# Altium PCB PCB1.PcbDoc
Units mm, origin at the board's own origin, x right, y up, seen from the top; angles counter-clockwise.
Board outline 50 x 65 mm, 2 copper layers (Top Layer, Bottom Layer); 27 components, 24 nets, 140 pads, 7 vias.
Unrouted connection lines stored in the file: 43.
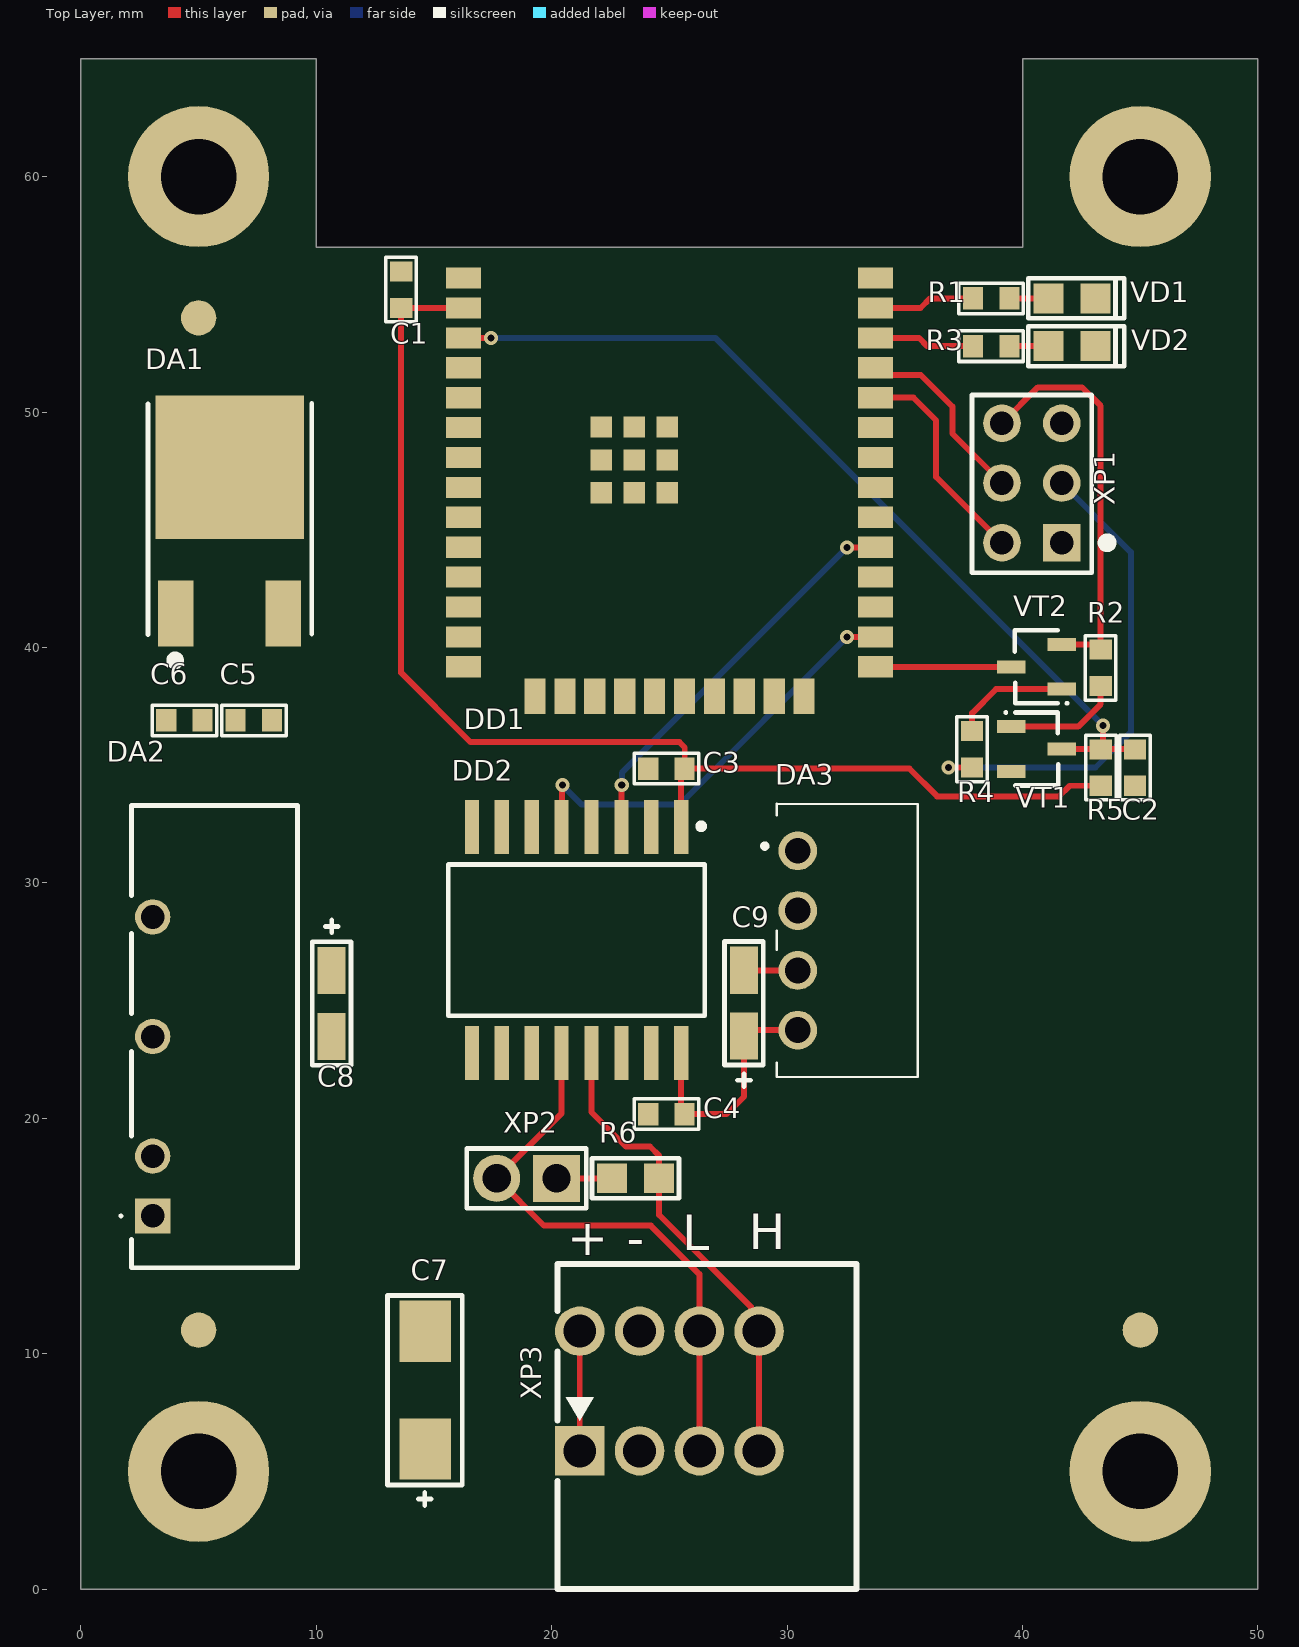
[diagram p0: Top Layer view]
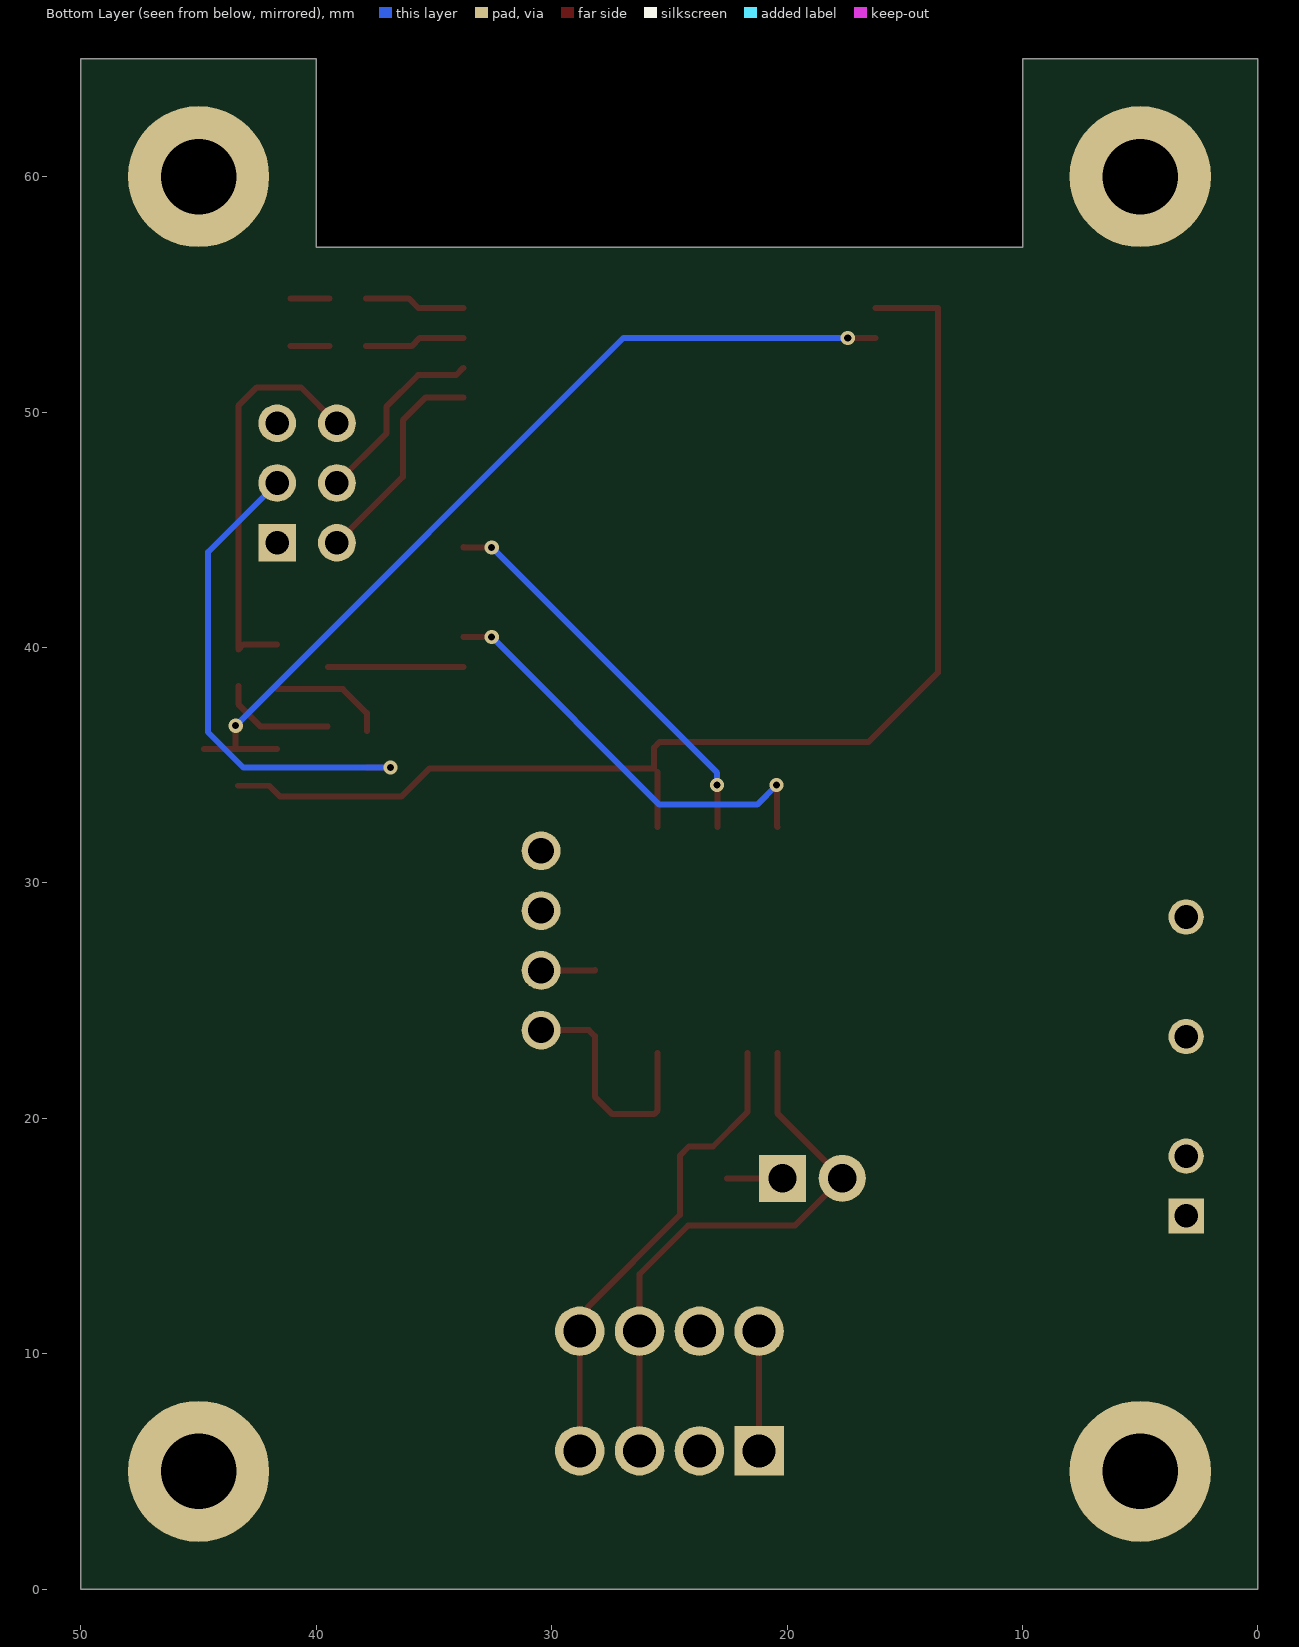
[diagram p1: Bottom Layer view, seen from below]
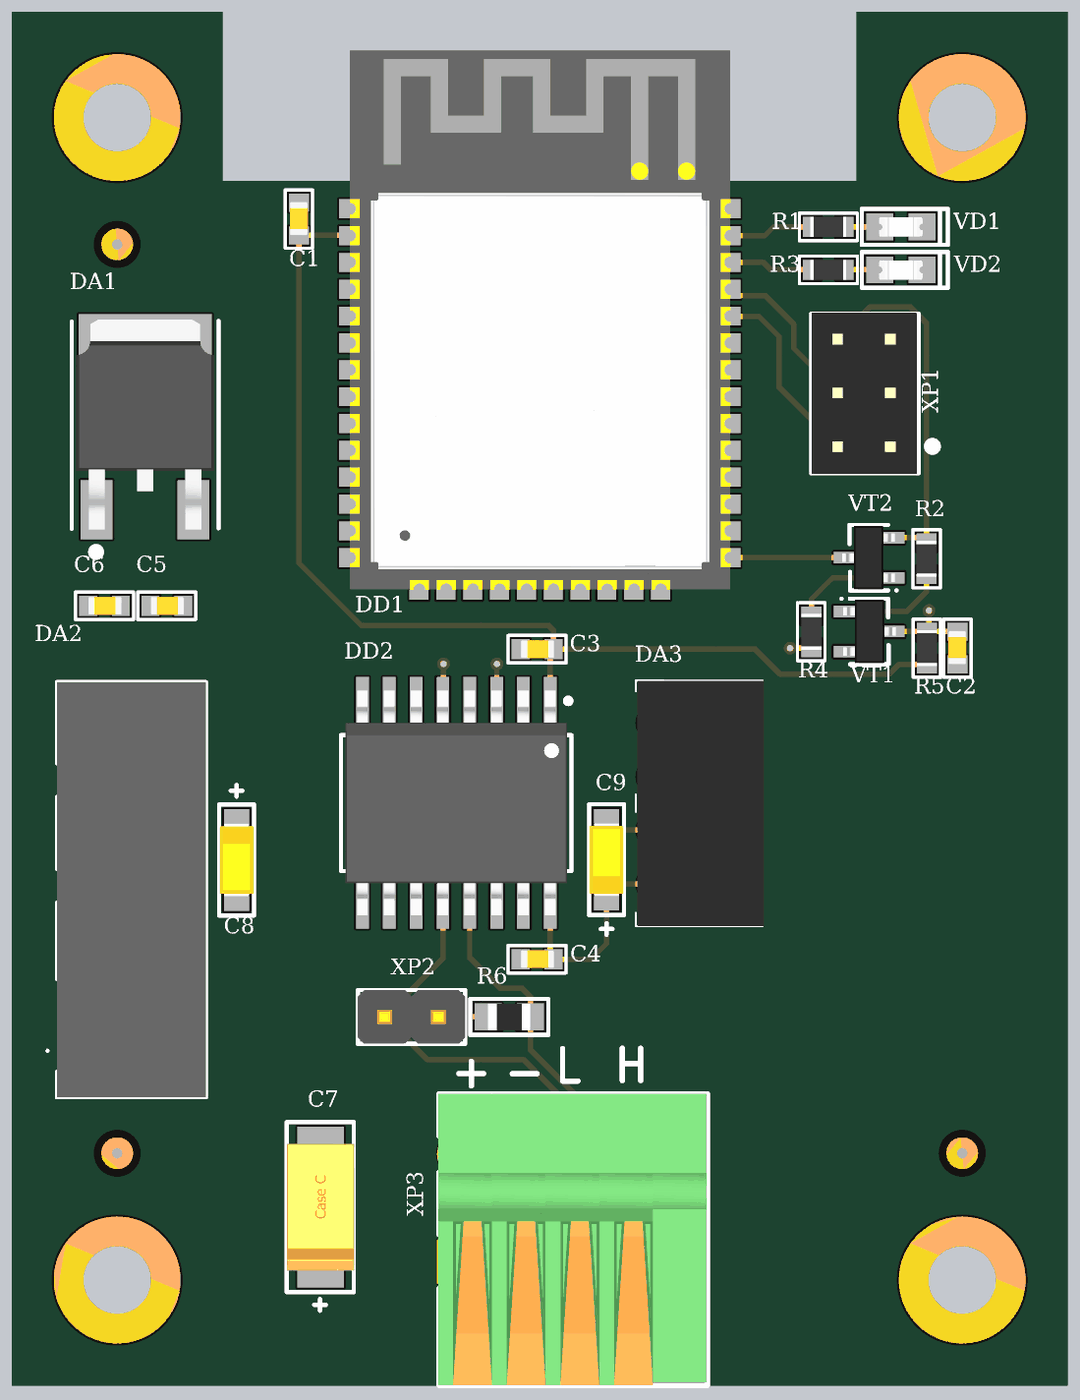
[diagram p2: 3D render of the assembled board from above, using the file's embedded part models]

## Layer stack, top to bottom
Top Solder: solder mask 0.0102, Solder Resist, Dk 3.5
Top Layer: signal copper 0.0356
Dielectric 1: dielectric 0.32, FR-4, Dk 4.8
Bottom Layer: signal copper 0.0356
Bottom Solder: solder mask 0.0102, Solder Resist, Dk 3.5

## Board outline
0,0 0,65 10,65 10,57 40,57 40,65 50,65 50,0

## Design rules (kind name [scope] priority, off if disabled: settings)
Clearance [All] p1: gap=0.254 ignorepadtopadclearanceinfootprint=FALSE
PolygonConnect [All] p1: connectstyle=Relief reliefconductorwidth=0.254 reliefentries=4 polygonreliefangle="90 Angle" airgapwidth=0.254
RoutingVias [All] p1: holewidth=0.711 width=1.27 viastyle="Through Hole" minholewidth=0.711 minwidth=1.27 maxholewidth=0.711 maxwidth=1.27
SolderMaskExpansion [All] p1: expansion=0.102 istentingtop=FALSE
SupplyNets "Schematic Supply Nets_14" [InNet('LED2')] p1: voltage=0.000
SupplyNets "Schematic Supply Nets_13" [InNet('GND_12V')] p2: voltage=0.000
SupplyNets "Schematic Supply Nets_12" [InNet('+12V')] p3: voltage=0.000
SupplyNets "Schematic Supply Nets_11" [InNet('LED1')] p4: voltage=0.000
SupplyNets "Schematic Supply Nets_9" [InNet('IO0')] p5: voltage=0.000
SupplyNets "Schematic Supply Nets_8" [InNet('EN')] p6: voltage=0.000
SupplyNets "Schematic Supply Nets_7" [InNet('RTS')] p7: voltage=0.000
SupplyNets "Schematic Supply Nets_6" [InNet('RX')] p8: voltage=0.000
SupplyNets "Schematic Supply Nets_5" [InNet('TX')] p9: voltage=0.000
SupplyNets "Schematic Supply Nets_4" [InNet('DTR')] p10: voltage=0.000
SupplyNets "Schematic Supply Nets_3" [InNet('GND_CAN')] p11: voltage=0.000
SupplyNets "Schematic Supply Nets_2" [InNet('+5V_CAN')] p12: voltage=0.000
SupplyNets "Schematic Supply Nets_1" [InNet('+3.3V')] p13: voltage=0.000
SupplyNets "Schematic Supply Nets" [InNet('GND')] p14: voltage=0.000
Width [All] p1: maxlimit=0.254 minlimit=0.254 preferedwidth=0.254
30 further rules are at their usual default settings.

## Components (designator, comment, footprint, x,y, rotation, side; value= is the part's Value field where it differs from the comment)
C1 "0,1мкФ" CAP_0603 13.6,54.4 r90 top
C2 "0,1мкФ" CAP_0603 44.775,34.1 r90 top
C3 "0,1мкФ" CAP_0603 24.075,34.85 r0 top
C4 "0,1мкФ" CAP_0603 24.075,20.175 r0 top
C5 "0,1мкФ" CAP_0603 6.55,36.9 r0 top
C6 "0,1мкФ" CAP_0603 3.6,36.9 r0 top
C7 "10мкФх35B" CAP_C 14.625,5.95 r90 top
C8 "10мкФх10B" CAP_A 10.65,26.275 r270 top
C9 "10мкФх10B" CAP_A 28.166,23.488 r90 top
DA1 "LM1117-3.3" TO-252 4.025,41.45 r0 top
DA2 "B1205S-2WR3" B1205S2WR3 3.05,15.85 r90 top
DA3 "B0505S-1WR3" B0505S1WR3 30.452,31.362 r270 top
DD1 "ESP32-WROOM-32E" ESP32_WROOM_32E 16.254,55.688 r0 top locked
DD2 "CA-IS3052W" SOIC-16W 25.499,32.378 r270 top
R1 "330" RES_0603 37.864,54.829 r0 top
R2 "12к" RES_0603 43.316,38.328 r90 top
R3 "330" RES_0603 37.864,52.797 r0 top
R4 "12к" RES_0603 37.855,36.473 r270 top
R5 "10к" RES_0603 43.325,35.7 r270 top
R6 "120" RES_0805 24.56,17.45 r180 top
VD1 "KP-2012EC" LED_0805 41.096,54.829 r0 top
VD2 "KP-2012EC" LED_0805 41.096,52.797 r0 top
VT1 "BC846B" SOT-23-3 39.515,36.636 r0 top
VT2 "BC846B" SOT-23-3 41.665,38.226 r180 top
XP1 "PLD-6" PLD-6 41.665,44.445 r90 top
XP2 "B2P-VH" HDR-TH_2P-P2.54-V-M 18.93,17.45 r180 top
XP3 "KF141R-2.54-4P" CONN-TH_4P-P2.54_KF141R-2.54-4P 25,8.415 r0 top locked

## Footprints (in the part's own frame and the unit in brackets; to place one, negate y for a bottom-side part, rotate by r counter-clockwise, add the part's x,y. Pads: shape width x height; smd on the part's side, far side on the other; paste and mask are expansions set on the pad)
B0505S1WR3 [mm]
  round 1.65 hole 1.1: 1(0,0) 2(2.54,0) 3(5.08,0) 4(7.62,0)
  silkscreen extent -2,-1.5 9.61,5.1, body extent -1.99,-0.83 9.61,5.17, height 10.08
B1205S2WR3 [mm]
  rect 1.5x1.5 hole 1: 1(0,0)
  round 1.5 hole 1: 2(2.54,0) 4(7.62,0) 6(12.7,0)
  silkscreen extent -2.2,-6.15 17.44,1.4, body extent -2.21,-6.15 17.44,0.9, height 10.51
CAP_0603 [mm]
  rect 0.85x0.95 smd: 1(0.025,0) 2(1.575,0)
  silkscreen extent -0.58,-0.65 2.17,0.65, body extent 0.02,-0.43 1.63,0.44, height 0.8
CAP_A [mm]
  rect 2x1.2 smd: 1(0,0) 2(2.8,0)
  silkscreen extent -2.15,-0.82 4.03,0.82, body extent -0.33,-0.8 3.13,0.8, height 1.65
CAP_C [mm]
  rect 2.6x2.2 smd: 1(0,0) 2(5,0)
  silkscreen extent -2.4,-1.58 6.53,1.6, body extent -0.5,-1.6 5.5,1.6, height 2.5
CONN-TH_4P-P2.54_KF141R-2.54-4P [mm]
  rect 2.1x2.1 hole 1.4 paste-2539.97 mask+0.051: 1(-3.81,-2.54)
  round 2.1 hole 1.4 paste-2539.97 mask+0.051: 1(-3.81,2.54) 2(-1.27,-2.54) 2(-1.27,2.54) 3(1.27,-2.54) 3(1.27,2.54) 4(3.81,-2.54) 4(3.81,2.54)
  silkscreen extent -4.76,-8.41 7.94,5.39, body extent -4.8,-8.4 7.9,5.4, height 12.77
ESP32_WROOM_32E [mm]
  rect 1.5x0.9 smd: 1(0,0) 2(0,-1.27) 3(0,-2.54) 4(0,-3.81) 5(0,-5.08) 6(0,-6.35) 7(0,-7.62) 8(0,-8.89) 9(0,-10.16) 10(0,-11.43) 11(0,-12.7) 12(0,-13.97) 13(0,-15.24) 14(0,-16.51) 25(17.5,-16.51) 26(17.5,-15.24) 27(17.5,-13.97) 28(17.5,-12.7) 29(17.5,-11.43) 30(17.5,-10.16) 31(17.5,-8.89) 32(17.5,-7.62) 33(17.5,-6.35) 34(17.5,-5.08) 35(17.5,-3.81) 36(17.5,-2.54) 37(17.5,-1.27) 38(17.5,0)
  rect 0.9x0.9 smd: 1(5.85,-9.12) 1(5.85,-7.72) 1(5.85,-6.32) 1(7.25,-9.12) 1(7.25,-7.72) 1(7.25,-6.32) 1(8.65,-9.12) 1(8.65,-7.72) 1(8.65,-6.32)
  rect 0.9x1.5 smd: 15(3.035,-17.76) 16(4.305,-17.76) 17(5.575,-17.76) 18(6.845,-17.76) 19(8.115,-17.76) 20(9.385,-17.76) 21(10.655,-17.76) 22(11.925,-17.76) 23(13.195,-17.76) 24(14.465,-17.76)
  body extent -0.25,-18.03 17.79,7.49, height 3.15
HDR-TH_2P-P2.54-V-M [mm]
  rect 2x2 hole 1.2: 1(-1.27,0)
  round 2 hole 1.2: 2(1.27,0)
  silkscreen extent -2.54,-1.27 2.54,1.27, body extent -2.54,-1.27 2.55,1.27, height 8.5
LED_0805 [mm]
  rect 1.27x1.27 smd: 1(0,0) 2(2,0)
  silkscreen extent -0.85,-0.85 3.22,0.85, body extent -0.03,-0.46 2.03,0.45, height 0.85
PLD-6 [mm]
  rect 1.6x1.6 hole 1: 1(0,0)
  round 1.6 hole 1: 2(0,2.54) 3(2.54,0) 4(2.54,2.54) 5(5.08,0) 6(5.08,2.54)
  silkscreen extent -1.27,-2.12 6.27,3.81, body extent -1.3,-1.2 6.32,3.8, height 8.5
RES_0603 [mm]
  rect 0.85x0.95 smd: 1(0.025,0) 2(1.575,0)
  silkscreen extent -0.58,-0.65 2.17,0.65, body extent -0.05,-0.48 1.65,0.48, height 0.6
RES_0805 [mm]
  rect 1.27x1.27 smd: 1(0,0) 2(2,0)
  silkscreen extent -0.85,-0.85 2.85,0.85, body extent 0,-0.62 2,0.62, height 0.6
SOIC-16W [mm]
  rect 2.3x0.6 smd: 1(0,0) 2(0,-1.27) 3(0,-2.54) 4(0,-3.81) 5(0,-5.08) 6(0,-6.35) 7(0,-7.62) 8(0,-8.89) 9(9.6,-8.89) 10(9.6,-7.62) 11(9.6,-6.35) 12(9.6,-5.08) 13(9.6,-3.81) 14(9.6,-2.54) 15(9.6,-1.27) 16(9.6,0)
  silkscreen extent -0.15,-9.9 8.03,1, body extent -0.52,-9.7 10.11,0.8, height 2.62
SOT-23-3 [mm]
  rect 1.2x0.55 smd: 1(0,0) 2(0,-1.9) 3(2.15,-0.95)
  silkscreen extent -0.27,-2.5 2,0.65, body extent -0.15,-2.45 2.35,0.55, height 1
TO-252 [mm]
  rect 1.5x2.8 smd: 1(0,0) 3(4.575,0)
  rect 6.3x6.1 smd: 2(2.3,6.2)
  silkscreen extent -1.17,-2.12 5.77,8.93, body extent -0.97,-0.94 5.57,9, height 2.44

## Part data
C1 C2 C3 C4 C5 C6: library part Capacitor, Manufacturer=Murata, Model=GRM188R71H104KA93D
C7 C8 C9: library part Capacitor_Polar
  C7: Model="TECAP, 10 мкФ, 35 В, тип C, 10%"
  C8 C9: Model="TECAP, 10 мкФ, 10 В, тип A, 10%"
DA1: Manufacturer=STMicroelectronics, Model=LM1117-3.3
DA2 DA3: "Power Supply", Manufacturer_Name="Mornsun Power"
  DA2: Datasheet Link=https://www.mornsun-power.com/html/pdf/B1205S-2WR3.html, Height=10.41mm, Manufacturer_Part_Number=B1205S-2WR3
  DA3: Datasheet Link=https://datasheet.lcsc.com/szlcsc/1811151639_MORNSUN-Guangzhou-S-T-B0505S-1WR3_C131038.pdf, Height=10.16mm, Manufacturer_Part_Number=B0505S-1WR3
DD2: "Isolated CAN Transceiver"
R1 R3: library part Resistor_6, Manufacturer=Yageo, Model=RC0603FR-07330RL
R2 R4: library part Resistor_14, Manufacturer=Yageo, Model=RC0603FR-0712KL
R5: library part Resistor_1, Manufacturer=Yageo, Model=RC0603FR-0710KL
R6: library part Resistor_5, Manufacturer=Yageo, Model=RC0805FR-07120RL
VD1 VD2: library part LED, Manufacturer=Kingbright, Model=KP-2012EC
VT1 VT2: "npn"
XP1: library part Connector-6, Manufacturer=Connfly, Model=PLD-6
XP2: library part Connector-2, Manufacturer=JST, Model=B2P-VH

## Free pads (board coordinates)
  round 1.5 smd paste-0.5 mask+0.364: 1(5,11) 1(5,54) 1(45,11)
  round 1.5 on Top Solder paste-0.5 mask+0.364: 1(5,11) 1(5,54) 1(45,11)
  round 6 hole 3.2: ""(5,5) ""(5,60) ""(45,5) ""(45,60)

## Via types
v1: diameter 0.6, hole 0.3, Top Layer to Bottom Layer, tented both sides, 7 vias

## Nets (pads, with @x,y where several pads share a name; then routed paths per layer and width w, separated by ;. In a path a pad name is that pad's centre, name@x,y a point inside that pad or via, vN(x,y) a via of type N, cw(c..) or ccw(c..) an arc to the next point about the centre after c; other vN are vias at no path point)
+3.3V: C1.1 C3.2 C6.2 DA1.2 DD1.2 DD2.1 R5.2 XP1.1 | length 53.1
  Top Layer w0.254: DD1.2 16.247,54.425 C1.1 13.6,38.925 16.55,35.975 25.425,35.975 25.65,35.75 C3.2 35.2,34.85 36.375,33.675 41.55,33.675 42,34.125 R5.2 ; DD2.1 C3.2@25.499,34.699
+5V_CAN: C4.2 C9.1 DA3.4 DD2.11 DD2.16 | length 10.5
  Top Layer w0.254: DD2.16 25.499,20.326 C4.2 27.425,20.175 28.166,20.916 C9.1 28.42,23.742 DA3.4
+12V: C7.1 DA2.1 XP3.1 | length 5.1
  Top Layer w0.254: XP3.1@21.19,5.875 XP3.1@21.19,10.955
DTR: R2.2 VT2.2 XP1.6 | length 17.3
  Top Layer w0.254: XP1.6 40.65,51.05 42.525,51.05 43.316,50.259 R2.2 43.093,40.126 VT2.2 VT2.2@41.662,40.128
EN: C2.2 DD1.3 R5.1 VT1.3 | length 38.1
  Top Layer w0.254: DD1.3 16.256,53.15 v1(17.425,53.15) ; VT1.3 41.67,35.68 R5.1@43.425,35.68 ; v1(43.425,36.675) R5.1@43.425,35.68 ; C2.2@44.775,35.68 R5.1@43.425,35.68
  Bottom Layer w0.254: v1(17.425,53.15) 26.95,53.15 v1(43.425,36.675)
GND: C1.2 C2.1 C3.1 C5.1 C6.1 C8.2 DA1.1 DA2.4 DA3.1 DD1.1 DD1.15 DD1.38 DD2.2 DD2.8 VD1.2 VD2.2 XP1.5
GND_12V: C7.2 DA2.2 XP3.2
GND_CAN: C4.1 C9.2 DA3.3 DD2.9 DD2.10 DD2.15 | length 2.3
  Top Layer w0.254: C9.2 28.172,26.282 DA3.3
IO0: DD1.25 VT2.3 | length 5.8
  Top Layer w0.254: DD1.25 VT2.3@39.513,39.178
LED1: DD1.37 R1.1 | length 4.3
  Top Layer w0.254: DD1.37 35.666,54.418 36.077,54.829 R1.1
LED2: DD1.36 R3.1 | length 4.3
  Top Layer w0.254: DD1.36 35.599,53.148 35.95,52.797 R3.1
NetC5_2: C5.2 C8.1 DA1.3 DA2.6 DA3.2
NetDD1_26: DD1.26 DD2.5 | length 18.4
  Top Layer w0.254: DD2.5 20.435,32.394 20.435,34.134 v1(20.45,34.15) ; v1(32.55,40.45) 33.752,40.45 DD1.26
  Bottom Layer w0.254: v1(20.45,34.15) 21.275,33.325 25.425,33.325 v1(32.55,40.45)
NetDD1_29: DD1.29 DD2.3 | length 17.1
  Top Layer w0.254: DD2.3 22.967,32.386 22.967,34.142 v1(22.975,34.15) ; v1(32.55,44.25) 33.746,44.25 DD1.29
  Bottom Layer w0.254: v1(22.975,34.15) 22.975,34.675 v1(32.55,44.25)
NetDD2_12: DD2.12 XP2.2 XP3.3 | length 24.3
  Top Layer w0.254: DD2.12 20.419,20.209 XP2.2 19.67,15.44 24.21,15.44 26.27,13.38 26.27,10.955 XP3.3@26.27,5.875
NetDD2_13: DD2.13 R6.1 XP3.4 | length 20.5
  Top Layer w0.254: DD2.13 21.689,20.261 23.15,18.8 24.175,18.8 24.56,18.415 R6.1 24.56,15.89 28.457,11.993 28.457,11.308 28.81,10.955 XP3.4@28.81,5.875
NetR1_2: R1.2 VD1.1 | length 1.7
  Top Layer w0.254: R1.2 VD1.1
NetR2_1: R2.1 VT1.1 | length 5
  Top Layer w0.254: VT1.1 42.361,36.636 43.316,37.591 R2.1
NetR3_2: R3.2 VD2.1 | length 1.7
  Top Layer w0.254: R3.2 VD2.1
NetR4_1: R4.1 VT2.1 | length 5
  Top Layer w0.254: R4.1 37.855,37.21 38.871,38.226 VT2.1
NetR6_2: R6.2 XP2.1 | length 2.4
  Top Layer w0.254: XP2.1 R6.2
RTS: R4.2 VT1.2 XP1.3 | length 22.2
  Top Layer w0.254: v1(36.85,34.9) 37.853,34.9 R4.2 v1@36.852,34.898
  Bottom Layer w0.254: v1(36.85,34.9) 43.1,34.9 44.6,36.4 44.6,44.05 XP1.3
RX: DD1.34 XP1.2 | length 9.3
  Top Layer w0.254: DD1.34 35.367,50.608 36.325,49.65 36.325,47.245 XP1.2
TX: DD1.35 XP1.4 | length 8.1
  Top Layer w0.254: DD1.35 34.057,51.575 35.675,51.575 37.025,50.225 37.025,49.085 XP1.4
pads on no net: DD1.4 DD1.5 DD1.6 DD1.7 DD1.8 DD1.9 DD1.10 DD1.11 DD1.12 DD1.13 DD1.14 DD1.16 DD1.17 DD1.18 DD1.19 DD1.20 DD1.21 DD1.22 DD1.23 DD1.24 DD1.27 DD1.28 DD1.30 DD1.31 DD1.32 DD1.33 DD2.4 DD2.6 DD2.7 DD2.14

## Silkscreen, mask and mechanical layers (free items; w line width, h text height)
Top Overlay:
  text "H" at 28.379,14.429 h1.52
  text "L" at 25.554,14.404 h1.52
  text "+" at 20.654,14.175 h1.52
  text "-" at 23.179,14.167 h1.52
Mechanical 13:
  the board outline again, w0.254